# Altium PCB Sensor_Box_Smart_IO.PCBDOC (part 2 of 2)
Units mil, origin at the board's own origin, x right, y up, seen from the top; angles counter-clockwise.
Board outline 895.86 x 2876.17 mil, 2 copper layers (Top, Bot), stack 61.855 mil thick; 100 components, 69 nets, 285 pads, 161 vias.
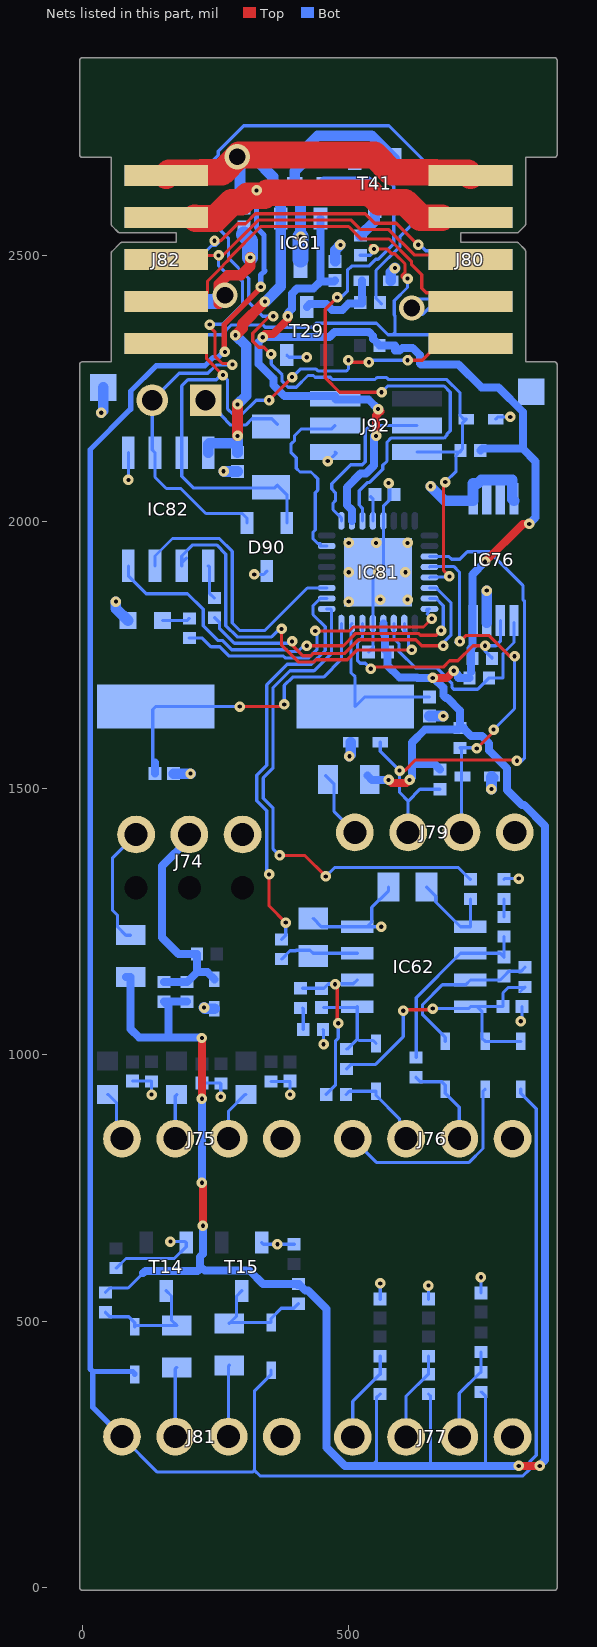
[diagram p2: the nets of this part, all layers, seen from the top]

## Via types
v1: diameter 19.68, hole 7.87, Top to Bot, tented both sides, 151 vias
v2: diameter 19.68, hole 7.87, Top to Bot, 7 vias
v3: diameter 47.24, hole 31.5, Top to Bot, tented both sides, 3 vias

## Nets (pads, with @x,y where several pads share a name; then routed paths per layer and width w, separated by ;. In a path a pad name is that pad's centre, name@x,y a point inside that pad or via, vN(x,y) a via of type N, cw(c..) or ccw(c..) an arc to the next point about the centre after c; other vN are vias at no path point) (continued)
GND: C178.2 C179.2 C180.2 C181.1 C182.1 C183.1 C184.2 C186.2 C189.2 C190.2 C191.2 C221.1 C222.2 C223.2 C306.1 C307.1 D55.2 D89.2 D90.3 D91.2 D124.2 D125.2 D138.2 IC61.3 IC62.4 IC76.1 IC76.2 IC76.3 IC76.4 IC76.7 IC81.5 IC81.21 IC81.33 IC82.5 J74.3 J75.4 J76.4 J77.4 J79.4 J80.9 J81.4 J82.9 J92.6 LD28.1 R233.1 R235.1 R237.1 R240.2 R245.2 R263.1 R266.1 R497.2 T14.2 T15.2 T29.2 T41.2 TP24.1 | length 3020.4
  Top w20: v3@255.91,2409.45 255.91,2445.99 272.76,2462.85 297.49,2462.85 314.96,2480.31 v1(314.96,2496.06)
  Bot w6: R263.1@62.99,599.61 63.78,599.61 81.94,617.77 172.89,617.77 194.88,639.76 T14.2@194.88,647.64 192.91,649.61 v1(165.35,649.61) ; IC82.5@86.42,2129.92 86.61,2129.72 v1(86.61,2078.74) ; C180.2@94.49,950.79 129.13,950.79 R233.1@129.92,950 v1(129.92,925.2) ; C179.2@224.41,946.85 259.05,946.85 R235.1@259.84,946.06 v1(259.84,921.26) ; v1(322.63,1901.29) 340.26,1901.29 D90.3@346.46,1907.48 ; T15.2@336.61,647.64 339.76,644.49 v1(366.14,644.49) R266.1@397.64,644.49 ; R237.1@354.33,950 388.98,950 389.76,949.21 v1(389.76,925.2) ; T29.2@383.86,2312.99 387.79,2309.06 v1(421.26,2309.06) ; C184.2@433.07,1255.91 448.62,1240.35 IC62.4@515.75,1240.35 ; R240.2@451.57,1047.24 452.76,1046.06 v1(452.76,1019.68) ; v1(460.63,2114.17) 461.41,2114.17 476.38,2129.13 J92.6@474.41,2131.1 ; C221.1@537.4,1755.91 545.28,1763.78 IC81.5@545.28,1809.06 545.28,1895.67 v1(555.12,1905.51) 564.96,1915.35 IC81.21@564.96,2001.97 564.96,2029.57 576.77,2041.38 576.77,2070.66 v1(574.7,2072.74) ; C189.2@559.06,541.34 v1(559.06,570.87) ; v1(561.02,1240.16) 515.94,1240.16 IC62.4@515.75,1240.35 ; C186.2@574.8,1314.96 574.8,1308.07 543.26,1276.53 543.26,1249.17 534.45,1240.35 IC62.4@515.75,1240.35 ; v3@616.11,2418.16 657.48,2418.16 669.3,2429.98 711.76,2429.98 J80.9@728.35,2413.39 662.23,2413.39 638.61,2389.76 v3@618.11,2389.76 ; C190.2@649.61,541.34 v1(649.61,566.93) ; C191.2@748.03,553.15 v1(748.03,582.68) ; D91.2@775.59,2192.91 779.53,2196.85 v1(803.15,2196.85) ; R245.2@791.34,1329.53 792.52,1330.71 v1(818.9,1330.71) ; v1(822.83,1062.99) 824.8,1064.96 C183.1@824.8,1090.55
  Bot w20: v1(35.43,2204.72) 39.37,2208.66 TP24.1@39.37,2252.28 ; v1(62.99,1850.39) 62.99,1837.6 LD28.1@85.63,1814.96 ; C306.1@171.47,1527.56 v1(203,1527.56) ; v1(228.35,1088.58) 230.32,1086.61 D55.2@247.92,1086.61 ; v3@255.91,2409.45 240.53,2409.45 ; v3@263.78,2417.32 232.66,2417.32 236.59,2413.39 ; v1(265.1,2095.14) 265.75,2094.49 C223.2@291.34,2094.49 ; v1(409.45,2535.43) 409.45,2600.39 398.71,2611.13 D138.2@398.71,2637.8 398.71,2658.21 R497.2@421.6,2681.1 421.6,2703.99 442.02,2724.41 542.78,2724.41 T41.2@586.09,2681.1 ; C182.1@474.41,2488.82 474.41,2509.84 v1(484.25,2519.68) ; v1(501.18,1560.24) 503.94,1562.99 D124.2@503.94,1586.61 ; D89.2@578.6,2452.76 578.6,2468.36 v1(586.61,2476.37) ; C307.1@651.62,1635.83 677.18,1635.83 v1(677.31,1635.7) ; v1(653.54,2066.92) 653.54,2065.82 679.99,2039.37 733.27,2039.37 IC76.1@733.27,2043.31 733.27,2071.9 741.66,2071.9 748.51,2078.74 807.09,2078.74 807.09,2042.32 IC76.4@810.04,2039.37 ; IC76.7@758.86,1811.02 IC76.7@758.86,1814.96 v1(758.86,1871.06) ; v1(767.72,1498.58) 767.72,1521.32 D125.2@768.6,1522.21 D125.2@770.85,1519.95 ; 236.59,2413.39 J82.9@157.48,2413.39 161.42,2409.45 240.53,2409.45 ; 236.59,2413.39 240.53,2409.45
  Bot w30: 303.15,2539.37 314.96,2527.56 v1(314.96,2496.06) ; IC61.3@409.45,2492.13 v1(409.45,2535.43)
  other v1: 500,1850.39 559.06,1854.33 610.24,1854.33 500,1905.51 606.3,1905.51 500,1960.63 551.18,1960.63 610.24,1960.63
  other v3: 618.11,2401.57 267.72,2425.2
INT: IC81.19 R497.1 T41.1 | length 1229.1
  Top w6: v2@478.35,2426.3 v2(478.35,2421.26) 455.85,2398.76 455.85,2270.12 482.53,2243.44 v2(561.55,2243.44) v2@561.55,2250.52
  Bot w6: v2(478.35,2421.26) 486.22,2421.26 497.53,2432.57 497.53,2472.08 505.37,2479.92 537.66,2479.92 550.71,2492.96 555.05,2492.96 584.33,2522.24 584.33,2630.11 533.34,2681.1 T41.1@511.28,2681.1 ; IC81.19@525.59,2001.97 525.59,2025.85 519.68,2031.76 519.68,2058.57 535.26,2074.14 539.05,2074.14 563.83,2098.92 563.83,2106.23 571.71,2114.1 571.71,2149.79 579.06,2157.14 678.92,2157.14 684.2,2162.41 684.2,2164.51 690.55,2170.87 690.55,2243.44 678.92,2255.06 573.18,2255.06 v2(561.55,2243.44)
  Bot w20: R497.1@458.61,2681.1 T41.1@511.28,2681.1
IO0: J80.10 J82.10 R496.1 | length 873.5
  Top w6: v2@541.41,2518.84 547.24,2513.01 v2(547.24,2511.81) 572.26,2511.81 580.98,2503.09 586.54,2503.09 605.46,2484.18 605.46,2468.57 600.25,2463.36 600.25,2459.35 602.91,2456.69 v2(610.23,2456.69)
  Bot w6: J82.10@157.48,2334.65 174.17,2351.33 261.47,2351.33 279.53,2369.39 339.43,2369.39 343.42,2365.39 431.31,2365.39 438.84,2372.91 552.02,2372.91 573.6,2351.33 582.68,2351.33 ; R496.1@521.73,2500.33 540.17,2500.33 547.24,2507.41 v2(547.24,2511.81) ; v2(610.23,2456.69) 610.23,2439.83 585.49,2415.08 585.49,2388.06 586.54,2387 586.54,2355.2 582.68,2351.33 ; J80.10@728.35,2334.65 711.66,2351.33 582.68,2351.33
MODBUS_A: D90.1 IC82.6 J80.3 J82.3 JP6.2 | length 1465.2
  Top w6: J82.3@157.49,2492.12 165.36,2499.99 v1(255.62,2499.99) ; v1(238.95,2370.17) 238.95,2366.69 248.87,2356.77 248.87,2311.09 262.8,2297.16 279.75,2297.16 v1(281.65,2295.27) ; v1@255.63,2492.13 329.78,2566.28 504.59,2566.28 522.43,2548.43 575.14,2548.43 621.58,2501.99 622.73,2500.84 719.63,2500.84 J80.3@728.35,2492.13
  Bot w6: JP6.2@131.3,2228.35 181.83,2278.87 235.49,2278.87 251.05,2294.43 280.81,2294.43 v1(281.65,2295.27) ; JP6.2@131.89,2228.35 131.3,2227.76 131.3,2135.04 IC82.6@136.42,2129.92 136.42,2084.05 157.87,2062.6 185.04,2062.6 231.94,2015.7 300.24,2015.7 309.06,2006.89 D90.1@309.06,1998.03 ; v1@247.19,2371.83 248.1,2370.92 263.71,2370.92 300.34,2407.55 300.34,2451.63 282.9,2469.07 267.15,2469.07 255.62,2480.6 v1(255.62,2499.99)
MODBUS_B: D90.2 IC82.7 J80.5 J82.5 R327.1 | length 1269.5
  Top w6: J82.5@157.48,2334.65 216.54,2334.65 233.22,2317.96 233.22,2306.15 v1(263.78,2275.59) ; v1(350.39,2228.34) v1(393.7,2271.65) ; v1(499.45,2303.14) 503.12,2299.48 v1(537.88,2299.48) ; v1@614.17,2311.02 610.24,2307.09 v1(610.24,2303.15) 637.8,2303.15 669.29,2334.65 J80.5@728.35,2334.65
  Bot w6: v1(350.39,2228.34) 326.08,2228.34 299.21,2201.47 283.47,2201.47 272.34,2212.6 272.34,2267.03 v1(263.78,2275.59) 260.08,2275.59 251.36,2266.87 198.04,2266.87 186.42,2255.25 IC82.7@186.42,2129.92 186.42,2085.4 207.98,2063.83 361.08,2063.83 366.14,2068.9 383.86,2051.18 D90.2@383.86,1998.03 ; v1(393.7,2271.65) 408.77,2286.72 438.74,2286.72 442.14,2283.32 495.92,2283.32 499.45,2286.85 v1(499.45,2303.14) ; v1(537.88,2299.48) 541.54,2303.15 v1(610.24,2303.15)
MODBUS_DE: IC81.11 IC82.3 | length 537.8
  Bot w6: IC82.3@136.42,1917.32 136.42,1936.02 169.23,1968.83 256.93,1968.83 281.24,1944.53 281.24,1810.22 295.34,1796.11 342.45,1796.11 422.32,1875.98 IC81.11@458.66,1875.98
MODBUS_DI: IC81.31 IC82.4 | length 781.4
  Top w6: v1(421.26,1767.71) 490.04,1767.71 513.01,1790.68 630.88,1790.68 634.47,1787.1 664.29,1787.1 v1(673.23,1796.03)
  Bot w6: IC82.4@86.42,1917.32 86.42,1898.62 119.74,1865.3 197.43,1865.3 226.83,1835.9 226.83,1804.93 254.13,1777.63 262.92,1777.63 280.43,1760.11 382.53,1760.11 385.9,1756.75 404.29,1756.75 415.25,1767.71 v1(421.26,1767.71) ; IC81.31@651.57,1856.3 663.8,1856.3 677.31,1842.79 677.31,1800.11 v1(673.23,1796.03)
MODBUS_R_En: IC81.2 IC82.2 | length 736.1
  Top w6: v1(374.02,1799.21) 374.02,1768.63 405.77,1736.87 434.03,1736.87 438.42,1741.26 497.53,1741.26 516.11,1759.84 v1(618.11,1759.84)
  Bot w6: IC82.2@186.42,1917.32 IC82.2@186.42,1922.88 ; IC82.2@195.23,1931.69 IC82.2@186.42,1922.88 ; v1(374.02,1799.21) 370.31,1799.21 355.21,1784.11 290.37,1784.11 269.24,1805.25 269.24,1939.55 251.96,1956.83 207.23,1956.83 186.42,1936.02 IC82.2@186.42,1922.88 ; IC81.2@604.33,1809.06 604.33,1796.66 612.02,1788.97 612.02,1765.93 v1(618.11,1759.84)
MODBUS_RO: IC81.30 R328.1 | length 627.5
  Top w6: v1(393.7,1775.59) 393.7,1768.62 413.45,1748.87 429.06,1748.87 433.45,1753.26 492.56,1753.26 517.98,1778.68 625.91,1778.68 636.88,1767.71 v1(677.16,1767.71)
  Bot w6: R328.1@248.03,1820.08 248.82,1820.08 257.24,1811.66 257.24,1800.28 285.4,1772.11 390.22,1772.11 v1(393.7,1775.59) ; IC81.30@651.57,1875.98 663.8,1875.98 692.07,1847.71 692.07,1788.22 677.16,1773.32 v1(677.16,1767.71)
NetC183_2: C183.2 D56.1 D57.1 IC62.8 R239.1 R244.1 | length 604.9
  Top w6: v1(602.36,1082.68) 604.33,1084.65 655.51,1084.65 v1(657.48,1086.61)
  Bot w6: R239.1@496.06,973.62 504.48,982.04 550.28,982.04 602.36,1034.12 v1(602.36,1082.68) ; v1(657.48,1086.61) 724.61,1086.61 IC62.8@728.35,1090.35 ; R244.1@822.29,1118.75 R244.1@829.98,1126.43 ; D56.1@822.83,1025.2 D57.1@755.91,1025.2 749.85,1031.25 749.85,1081.54 741.04,1090.35 IC62.8@728.35,1090.35 ; IC62.8@728.35,1090.35 728.54,1090.55 C183.2@789.37,1090.55 789.37,1116.14 799.66,1126.43 R244.1@829.98,1126.43 ; R244.1@829.98,1126.43 830.71,1126.43 R244.1@830.71,1127.17 R244.1@829.98,1126.43
NetC184_1: C184.1 IC62.3 R242.1 | length 151
  Bot w6: R242.1@374.02,1179.53 389.76,1195.28 400.78,1195.28 401.62,1196.12 427.31,1196.12 433.07,1190.35 IC62.3@515.75,1190.35
NetC185_1: C185.1 D58.2 IC62.1 R239.2 | length 191.2
  Bot w6: C185.1@452.76,1088.58 513.98,1088.58 IC62.1@515.75,1090.35 515.75,1030.31 ; R239.2@496.06,1010.63 496.85,1010.63 515.75,1029.53 515.75,1030.31 ; D58.2@551.18,1021.26 545.64,1026.8 519.26,1026.8 515.75,1030.31
NetC185_2: C185.2 IC62.2 R241.1 R243.2 | length 341
  Top w6: v1(474.41,1132.28) 478.35,1128.35 478.35,1061.02 v1(480.31,1059.05)
  Bot w6: R241.1@413.39,1124.8 453.54,1124.8 461.02,1132.28 ; R243.2@457.87,925.2 457.87,925.98 474.86,942.97 474.86,1025.77 480.31,1031.23 v1(480.31,1059.05) ; v1(474.41,1132.28) 461.02,1132.28 ; IC62.2@515.75,1140.35 508.61,1133.22 461.96,1133.22 461.02,1132.28
NetC186_1: C186.1 IC62.5 R247.1 | length 172
  Bot w6: C186.1@645.67,1314.96 663.34,1297.29 663.34,1286.66 709.65,1240.35 IC62.5@728.35,1240.35 R247.1@728.35,1292.52
NetC187_1: C187.1 D59.2 IC62.7 R244.2 | length 307.8
  Bot w6: D59.2@681.1,1025.2 681.1,1032.68 638.64,1075.14 638.64,1094.42 675.76,1131.54 719.54,1131.54 IC62.7@728.35,1140.35 784.06,1140.35 C187.1@791.34,1147.64 800.54,1156.84 823.38,1156.84 R244.2@830.71,1164.17
NetC187_2: C187.2 IC62.6 R246.1 R248.2 | length 353.4
  Bot w6: R248.2@625.98,994.88 626.64,995.54 626.64,1107.35 709.65,1190.35 IC62.6@728.35,1190.35 784.06,1190.35 C187.2@791.34,1183.07 R246.1@791.34,1221.65
NetC222_1: C222.1 IC81.20 | length 46.9
  Bot w6: C222.1@541.34,2047.24 545.28,2043.31 IC81.20@545.28,2001.97
NetC306_2: C306.2 IC81.8 Q11.1 | length 623.9
  Top w6: v1(295.28,1653.54) 375.12,1653.54 v1(379.06,1657.48)
  Bot w6: C306.2@136.04,1527.56 132.19,1531.4 132.19,1647.94 Q11.1@137.8,1653.54 v1(295.28,1653.54) ; v1(379.06,1657.48) 379.06,1693.18 394.63,1708.75 452.84,1708.75 486.22,1742.13 IC81.8@486.22,1809.06
  Bot w15: C306.2@136.04,1527.56 136.04,1548.63
NetC307_2: C307.2 IC81.7 Q11.2 | length 306.5
  Bot w6: IC81.7@505.91,1809.06 504.2,1807.35 504.2,1716.8 511.81,1709.18 Q11.2@511.81,1653.54 529.53,1671.26 C307.2@651.62,1671.26
NetD55_1: D55.1 J74.2 R230.1 R231.1 R232.1 | length 434.5
  Bot w15: R231.1@153.54,1136.61 R230.1@196.85,1136.61 215.3,1155.06 ; J74.2@200.79,1413.39 200.79,1405.51 149.61,1354.33 149.61,1220.08 180.71,1188.98 R232.1@215.3,1188.98 215.3,1155.06 ; D55.1@247.92,1141.73 234.59,1155.06 215.3,1155.06
NetD57_2: D57.2 J76.1 | length 386.6
  Bot w6: J76.1@507.48,842.52 551.91,798.09 725.89,798.09 751.91,824.11 751.91,931.44 D57.2@755.91,935.43
NetD58_1: D58.1 J76.2 R243.1 | length 171.2
  Bot w6: R243.1@494.88,925.2 501.18,931.5 D58.1@551.18,931.5 551.18,924.02 595.07,880.13 595.07,854.93 J76.2@607.48,842.52
NetD59_1: D59.1 J76.3 R248.1 | length 172.6
  Bot w6: R248.1@625.98,957.87 634.4,949.46 674.56,949.46 681.1,942.91 D59.1@681.1,935.43 681.1,927.95 707.48,901.57 J76.3@707.48,842.52
NetD60_2: D60.2 F8.2 R261.2 T14.3 | length 223.6
  Bot w6: R261.2@43.31,516.93 51.72,508.51 87.16,508.51 98.43,497.24 D60.2@98.43,489.76 100.79,492.13 F8.2@177.17,492.13 167.28,502.02 167.28,547.29 T14.3@157.48,557.09
NetD61_2: D61.2 F9.2 R264.2 T15.3 | length 218.1
  Bot w6: F9.2@275.59,496.06 F9.2@277.17,497.64 ; T15.3@299.21,557.09 289.42,547.29 289.42,509.89 F9.2@277.17,497.64 ; R264.2@405.51,532.68 397.09,524.26 373.47,524.26 354.33,505.12 D61.2@354.33,497.64 F9.2@277.17,497.64
NetD89_1: D89.1 R330.2 T29.3 | length 157.9
  Bot w15: T29.3@421.26,2403.54 426.27,2408.55 458.04,2408.55 468.68,2397.92 488.02,2397.92 499.55,2409.45 524.8,2409.45 D89.1@524.8,2452.56
NetD138_1: D138.1 R496.2 T41.3 | length 199.6
  Bot w20: D138.1@453.83,2637.8 536.87,2637.8 548.69,2625.98 T41.3@548.69,2590.55 548.69,2564.3 R496.2@521.73,2537.34
NetF6_1: F6.1 J74.1 | length 226.7
  Bot w6: F6.1@90.55,1224.41 81.69,1224.41 65.99,1240.11 65.99,1262.02 56.35,1271.65 56.35,1368.95 J74.1@100.79,1413.39
NetF7_1: F7.1 J79.1 | length 129
  Bot w6: F7.1@456.69,1523.62 472.39,1507.92 472.39,1456.35 J79.1@511.42,1417.32
NetF8_1: F8.1 J81.2 | length 131.1
  Bot w6: J81.2@174.41,283.46 174.41,410.63 F8.1@177.17,413.39
NetF9_1: F9.1 J81.3 | length 134.3
  Bot w6: J81.3@274.41,283.46 274.41,416.14 F9.1@275.59,417.32
NetIC81_32: IC81.32 R325.1 | length 555
  Top w6: v1(437.01,1795.27) 500.63,1795.27 508.04,1802.68 640.19,1802.68 v1(655.81,1818.3)
  Bot w6: R325.1@200.79,1781.89 224.98,1781.89 241.24,1765.63 257.94,1765.63 275.46,1748.11 377.56,1748.11 380.93,1744.75 424.94,1744.75 440.1,1759.91 440.1,1788.47 437.01,1791.57 v1(437.01,1795.27) ; IC81.32@651.57,1836.61 648.45,1836.61 645.76,1833.93 649.61,1830.09 646.81,1827.3 v1(655.81,1818.3)
NetIC82_1: IC82.1 R328.2 | length 65.5
  Bot w6: IC82.1@236.42,1917.32 238.83,1914.91 238.83,1865.5 247.24,1857.09 R328.2@248.03,1857.09
NetJ75_1: J75.1 R234.2 | length 95.1
  Bot w6: R234.2@47.24,925.2 49.21,925.2 63.93,910.48 63.93,853 J75.1@74.41,842.52
NetJ75_2: J75.2 R236.2 | length 83.8
  Bot w6: J75.2@174.41,842.52 174.41,922.44 R236.2@177.17,925.2
NetJ75_3: J75.3 R238.2 | length 97.4
  Bot w6: J75.3@274.41,842.52 274.41,894.49 305.12,925.2 R238.2@307.09,925.2
NetJ77_1: J77.1 R253.2 R254.2 | length 173.3
  Bot w6: J77.1@507.48,282.78 507.48,349.61 558.27,400.39 R253.2@559.06,400.39 R254.2@559.06,434.25
NetJ77_2: J77.2 R252.2 R255.2 | length 169.4
  Bot w6: J77.2@607.48,282.78 607.48,359.06 648.82,400.39 R252.2@649.61,400.39 R255.2@649.61,434.25
NetJ77_3: J77.3 R251.2 R256.2 | length 176.6
  Bot w6: J77.3@707.48,282.78 707.48,364.57 747.24,404.33 R251.2@748.03,404.33 R256.2@748.03,442.13
NetJ80_4: J80.4 J82.4 | length 720.7
  Top w6: J82.4@157.48,2413.39 174.07,2429.98 235.09,2429.98 235.09,2452.05 264.89,2481.85 264.89,2482.62 274.46,2492.19 274.46,2493.99 334.75,2554.28 499.62,2554.28 523.25,2530.65 536.25,2530.65 536.44,2530.84 575.77,2530.84 617.46,2489.15 617.46,2483.58 636.95,2464.08 636.95,2438.09 645.06,2429.98 711.76,2429.98 J80.4@728.35,2413.39
NetJ80_6: J80.6 J82.6 | length 652.9
  Bot w6: J82.6@157.48,2649.61 216.54,2649.61 255.21,2688.28 255.21,2695.67 302.95,2743.41 575.49,2743.41 669.29,2649.61 J80.6@728.35,2649.61
NetJ80_7: J80.7 R330.1 | length 296.2
  Bot w6: R330.1@561.29,2409.45 R330.1@558.67,2412.07 551.04,2419.7 551.04,2471.98 596.33,2517.27 596.33,2536.36 630.83,2570.87 J80.7@728.35,2570.87
NetJ80_8: J80.8 J82.8 | length 657.4
  Top w6: v1(248.03,2527.55) 259.55,2527.55 291.61,2559.61 306.14,2559.61 324.81,2578.28 530.98,2578.28 548.82,2560.43 589.17,2560.43 629.61,2519.99 v1(630.23,2519.99)
  Bot w6: J82.8@157.48,2492.13 216.63,2492.13 243.34,2518.84 250.88,2518.84 255.62,2523.57 251.64,2527.55 v1(248.03,2527.55) ; v1(630.23,2519.99) 633.32,2519.99 644.59,2508.72 652.61,2508.72 669.2,2492.13 J80.8@728.35,2492.13
NetJP6_1: JP6.1 R327.2 | length 164.7
  Bot w6: JP6.1@231.3,2228.35 257.83,2201.82 260.34,2201.82 260.34,2199.76 278.5,2181.6 306.36,2181.6 318.36,2193.6 355.61,2193.6 R327.2@366.14,2183.07
NetLD28_2: LD28.2 R325.2 | length 51.8
  Bot w6: LD28.2@150.59,1814.96 196.85,1814.96 R325.2@200.79,1818.9
NetR240_1: R240.1 R241.2 | length 41
  Bot w6: R241.2@413.39,1087.8 414.57,1086.61 R240.1@414.57,1047.24
NetR245_1: R245.1 R246.2 | length 33.9
  Bot w6: R246.2@791.34,1258.66 R245.1@791.34,1292.52
P3V3: C182.2 C221.2 F6.2 F7.2 IC61.2 IC76.8 IC81.4 IC81.18 J92.2 R230.2 R231.2 R251.1 R252.1 R253.1 R259.1 R260.1 R261.1 R264.1 R322.1 R323.1 R324.1 R329.2 TP23.1 | length 6628.4
  Top w15: v1(224.41,759.84) 224.41,758.57 226.38,756.61 v1(226.38,679.13) ; v1(224.41,917.32) v1(224.41,1031.5) ; v1(338.58,2346.46) 338.58,2347.72 343.1,2352.24 357.69,2352.24 385.83,2380.37 v1(385.83,2385.82) ; v1(551.18,2161.41) 551.18,2199.52 v1@559.18,2207.52 ; v1(574.8,1515.74) 580.64,1509.91 608.33,1509.91 v1(614.17,1515.75) ; v1(657.48,1707.32) 683.7,1707.32 v1(696.85,1720.47) ; v1(755.91,1925.2) 826.77,1996.06 v1(838.58,1996.06) ; v1(818.9,228.35) v1(858.27,228.35)
  Bot w6: R261.1@43.31,553.94 51.72,562.35 85.98,562.35 114.17,590.55 ; 543.31,228.35 551.91,236.95 551.91,356.24 R253.1@559.06,363.39 ; R252.1@649.61,363.39 653.54,359.45 653.54,228.35 ; R251.1@748.03,367.32 748.38,367.32 756.8,358.91 756.8,233.18 751.97,228.35
  Bot w15: F6.2@81.69,1145.67 F6.2@90.55,1145.67 90.55,1048.62 106.78,1032.39 161.42,1032.39 ; 114.17,590.55 118.11,594.49 216.54,594.49 220.47,598.43 ; R230.2@196.85,1099.61 R231.2@153.54,1099.61 161.42,1091.73 161.42,1032.39 ; v1(224.41,759.84) v1(224.41,917.32) ; v1(224.41,1031.5) 223.51,1032.39 161.42,1032.39 ; v1(226.38,679.13) 226.38,626.58 220.47,620.67 220.47,598.43 ; v1(385.83,2385.82) 385.83,2392.18 393.42,2399.78 393.42,2428.26 402.87,2437.71 433.43,2437.71 446.85,2451.13 ; R264.1@403.54,567.72 401.57,569.68 339.17,569.68 314.04,594.82 229.99,594.82 226.38,598.43 220.47,598.43 ; R264.1@405.51,569.68 406.3,569.68 418.39,557.59 423.31,557.59 458.01,522.89 458.01,263.05 492.71,228.35 543.31,228.35 653.54,228.35 751.97,228.35 v1(818.9,228.35) ; IC61.2@446.85,2568.9 446.85,2451.13 ; C182.2@474.41,2453.39 472.15,2451.13 446.85,2451.13 ; IC81.18@505.91,2001.97 505.91,2022.21 496.34,2031.77 496.34,2064.78 522.2,2090.64 532.22,2090.64 547.33,2105.76 547.33,2161.5 547.42,2161.41 v1(551.18,2161.41) ; F7.2@535.43,1523.62 543.31,1515.74 v1(574.8,1515.74) ; v1(555.12,2211.58) 537.46,2229.24 476.27,2229.24 J92.2@474.41,2231.1 474.41,2236.31 379.06,2236.31 358.36,2257.01 358.36,2268.97 330.99,2296.34 330.99,2337.59 338.58,2345.19 v1(338.58,2346.46) 339.29,2347.16 464.11,2347.16 473.36,2356.41 537.88,2356.41 545.78,2348.51 545.78,2343.59 557.87,2331.5 R329.2@557.87,2330.71 586.61,2330.71 586.61,2321.31 595.39,2321.31 600.57,2326.49 619.9,2326.49 633.58,2312.82 633.58,2297.62 635.64,2295.56 706.18,2295.56 749.47,2252.28 780.73,2252.28 826.49,2206.52 826.49,2137.52 ; IC81.4@564.96,1809.06 565.24,1808.78 565.24,1790.19 568.13,1787.3 568.13,1760.61 C221.2@572.83,1755.91 572.83,1730.31 594.77,1708.38 627.64,1708.38 628.7,1707.32 v1(657.48,1707.32) 659.06,1707.32 677.33,1689.06 677.33,1674.27 682.21,1669.38 685.02,1669.38 708.66,1645.74 R260.1@708.66,1612.99 ; v1(614.17,1515.75) 618.67,1520.25 618.67,1545.64 ; R259.1@671.31,1535.15 660.81,1545.64 618.67,1545.64 ; v1(696.85,1720.47) 704.72,1712.59 704.72,1708.33 705.73,1707.32 R322.1@726.28,1707.32 ; R260.1@716.54,1612.99 R260.1@714.37,1612.99 ; R322.1@729.19,1718.38 729.19,1761.42 728.35,1762.26 732,1765.92 732,1901.29 v1(755.91,1925.2) ; R324.1@746.85,2133.86 750.51,2137.52 826.49,2137.52 ; v1(838.58,1996.06) 850.58,2008.06 850.58,2113.43 826.49,2137.52 ; v1(858.27,228.35) 858.27,229.61 868.41,239.76 868.41,1429.53 829.16,1468.78 824.98,1468.78 796.86,1496.89 796.86,1537.64 763.5,1571 763.5,1584.47 749.83,1598.15 729.21,1598.15 R260.1@714.37,1612.99 ; 618.67,1545.64 618.67,1586.1 642.7,1610.12 705.79,1610.12 R260.1@708.66,1612.99 ; R260.1@708.66,1612.99 R260.1@714.37,1612.99
P5V0: C181.2 C223.1 IC61.1 IC82.8 J80.1 J82.1 | length 1404.5
  Top w20: v1(287.4,2350.39) 300.53,2363.51 300.53,2371.39 v1@339.52,2410.38 ; v1(291.34,2161.41) v1(291.34,2220.47)
  Top w50: J82.1@157.48,2649.61 162.8,2654.92 222.47,2654.92 223.56,2656.01 261.69,2656.01 v3(290.72,2685.04) 294.1,2688.42 548.11,2688.42 580.53,2656.01 662.27,2656.01 663.36,2654.92 723.03,2654.92 J80.1@728.35,2649.61
  Bot w20: IC82.8@236.42,2129.92 236.42,2145.83 238.23,2147.64 291.34,2147.64 ; v1(287.4,2350.39) 307.49,2330.3 307.49,2295.55 307.49,2236.62 v1(291.34,2220.47) ; v3(290.72,2685.04) v3@295.93,2679.83 ; C223.1@291.34,2129.92 291.34,2147.64 ; v1(291.34,2161.41) 291.34,2147.64 ; 295.93,2602.36 v3@295.93,2679.83 ; v1(342.52,2413.38) 343.63,2413.38 372.05,2441.8 IC61.1@372.05,2568.9 372.05,2594.49 370.24,2596.3 370.24,2605.57 357.69,2618.11 357.69,2647.35 325.22,2679.83 v3@295.93,2679.83
P12V0: D56.2 D60.1 D61.1 J80.2 J81.1 J82.2 | length 4887.1
  Top w10: v1(267.72,2318.9) 266.4,2320.21 266.4,2370.56 334.65,2438.8 v1(334.65,2440.94)
  Top w50: J82.2@211.22,2570.87 212.69,2569.39 249.88,2569.39 280.49,2600.01 298.46,2600.01 310.72,2612.28 341.61,2612.28 346.95,2617.62 539.72,2617.62 557.33,2600.01 605.34,2600.01 634.48,2570.87 J80.2@674.61,2570.87
  Bot w6: J81.1@74.41,283.46 140.92,216.96 319.32,216.96 322.83,220.47 ; D61.1@354.33,407.87 354.33,400.39 322.83,368.9 322.83,220.47 ; D56.2@822.83,935.43 822.83,927.95 851.91,898.87 851.91,248.64 839.31,236.03 839.31,222.11 826.7,209.5 333.8,209.5 322.83,220.47
  Bot w10: J81.1@74.41,283.46 19.69,338.19 19.69,405.51 ; D60.1@98.43,400 98.43,401.46 94.37,405.51 19.69,405.51 ; v1(267.72,2318.9) 265.1,2318.9 254.63,2308.43 245.25,2308.43 229.69,2292.87 138.51,2292.87 90.77,2245.13 90.77,2211.58 14.59,2135.4 14.59,410.61 19.69,405.51 ; v1(326.9,2622.05) 326.9,2552.39 340.96,2538.33 340.96,2472.66 342.52,2471.1 334.65,2463.23 v1(334.65,2440.94)
PROG_MOSI: IC81.15 J92.4 | length 351.4
  Bot w6: IC81.15@458.66,1954.72 446.44,1954.72 446.44,1959.5 441.66,1959.5 432.93,1968.24 432.93,1980.58 437.19,1984.84 437.19,2055.05 441.79,2059.65 441.79,2080.92 429.06,2093.64 408.42,2093.64 401.39,2100.67 401.39,2120.39 391.47,2130.31 391.47,2145.92 393.04,2147.5 398.31,2152.77 398.31,2162.09 410.29,2174.07 467.38,2174.07 J92.4@474.41,2181.1
PROG_SCK: IC81.17 J92.3 | length 320.8
  Bot w6: IC81.17@486.22,2001.97 486.22,2007.4 486.05,2007.4 470.44,2023.01 470.44,2035.01 474.87,2039.44 474.87,2055.05 468.03,2061.89 468.03,2071.62 503.56,2107.14 525.38,2107.14 530.83,2112.59 530.83,2171.65 539.92,2180.74 595.3,2180.74 595.67,2181.1 J92.3@627.95,2181.1
PWM1: IC81.10 R242.2 | length 772.6
  Top w6: v1(350.39,1338.58) 350.39,1279.53 v1(381.89,1248.03)
  Bot w6: v1(350.39,1338.58) 346.08,1342.9 346.08,1457.87 327.42,1476.52 327.42,1524.58 346.08,1543.24 346.08,1694.14 384.69,1732.75 429.91,1732.75 455.85,1758.69 455.85,1803.08 432.93,1826 432.93,1842.79 446.44,1856.3 IC81.10@458.66,1856.3 ; R242.2@374.02,1216.54 381.89,1224.41 v1(381.89,1248.03)
PWM2: IC81.9 R247.2 | length 953.3
  Top w6: v1(370.08,1374.01) 417.32,1374.01 v1(456.69,1334.64)
  Bot w6: v1(370.08,1374.01) 358.08,1386.01 358.08,1462.84 339.42,1481.49 339.42,1519.61 358.08,1538.27 358.08,1689.17 389.66,1720.75 434.88,1720.75 467.85,1753.72 467.85,1833.93 465.17,1836.61 IC81.9@458.66,1836.61 ; v1(456.69,1334.64) 473.57,1351.52 705.57,1351.52 727.56,1329.53 R247.2@728.35,1329.53
RESETn: D91.1 IC81.29 J82.7 J92.5 R324.2 | length 1357.4
  Top w6: v1(354.33,2314.96) 353,2314.96 340.34,2327.61 330.78,2327.61 319.74,2338.65 319.74,2354.26 351.3,2385.82 v1(358.27,2385.82) ; v1(681.1,2074.8) 678.01,2071.71 678.01,1908.61 v1(688.98,1897.64)
  Bot w6: J82.7@157.48,2570.87 216.63,2570.87 233.22,2554.28 236.29,2554.28 240.23,2558.21 247.68,2558.21 274.46,2531.43 274.46,2494.47 310.28,2458.66 312.34,2456.6 312.34,2412.07 338.58,2385.82 v1(358.27,2385.82) ; v1(354.33,2314.96) 354.54,2314.74 354.54,2296.11 374.86,2275.8 374.86,2263.85 385.9,2252.81 401.51,2252.81 423.42,2274.72 433.77,2274.72 437.17,2271.32 465.28,2271.32 469.35,2267.25 549.26,2267.25 552.82,2270.81 571.09,2270.81 574.83,2267.06 683.9,2267.06 708.71,2242.25 708.71,2199.76 715.55,2192.91 D91.1@720.47,2192.91 713.63,2186.07 713.63,2137.65 R324.2@709.84,2133.86 707.09,2131.1 J92.5@627.95,2131.1 ; IC81.29@651.57,1895.67 652.56,1896.65 687.99,1896.65 v1(688.98,1897.64) ; v1(681.1,2074.8) 701.43,2095.13 701.43,2124.65 707.87,2131.1 R324.2@709.5,2131.1
SCL: D125.1 IC81.28 J79.3 R260.2 | length 721.5
  Top w6: v1(708.66,1775.59) 719.63,1786.56 763.71,1786.56 802.24,1748.03 v1(811.02,1748.03) ; v1(740.16,1574.8) 771.65,1606.3 v1(771.65,1610.24)
  Bot w6: IC81.28@651.57,1915.35 652.7,1916.48 696.78,1916.48 707.82,1905.44 707.82,1780.93 v1@702.47,1775.59 ; v1@700.79,1773.9 v1@702.47,1775.59 ; v1(708.66,1775.59) v1@702.47,1775.59 ; J79.3@711.42,1417.32 711.42,1573.23 R260.2@708.66,1575.98 741.34,1575.98 v1(740.16,1574.8) ; v1(771.65,1610.24) 811.02,1649.6 v1(811.02,1748.03)
SCL1: IC76.6 IC81.6 R323.2 | length 439.4
  Top w6: v1(541.34,1724.41) 544.43,1727.5 677.24,1727.5 689.04,1739.31 704.79,1739.31 733.19,1767.71 v1(755.9,1767.71)
  Bot w6: IC81.6@525.59,1809.06 525.59,1782.88 516.2,1773.49 516.2,1739.97 521.47,1734.7 531.05,1734.7 v1(541.34,1724.41) ; R323.2@769.01,1746.25 R323.2@769.01,1744.09 755.9,1757.2 v1(755.9,1767.71) 776.45,1767.71 784.45,1775.71 IC76.6@784.45,1814.96
SDA: D124.1 IC81.27 J79.2 R259.2 | length 1043.8
  Top w6: v1(595.33,1533.25) 605.03,1533.25 625.2,1553.43 814.09,1553.43 v1(815.65,1551.87) v1@818.21,1551.87
  Bot w6: D124.1@559.06,1586.61 559.06,1569.53 v1(595.33,1533.25) 595.33,1492.11 611.42,1476.02 ; J79.2@611.42,1417.32 611.42,1476.02 ; IC81.27@651.57,1935.04 687.91,1935.04 692.98,1929.97 708.59,1929.97 722.66,1944.04 763.71,1944.04 826.86,1880.89 826.86,1854.13 829.86,1851.13 829.86,1557.3 823.68,1551.11 823.68,1550.68 822.49,1551.87 v1(815.65,1551.87) ; R259.2@671.31,1498.14 633.54,1498.14 611.42,1476.02
SDA1: IC76.5 IC81.3 R322.2 | length 406.8
  Bot w6: IC81.3@584.65,1809.06 584.65,1781.23 594.04,1771.84 594.04,1757.26 625.14,1726.16 665.29,1726.16 678.01,1713.44 678.01,1711.71 693.83,1695.89 693.83,1688.97 696.91,1685.88 741.85,1685.88 R322.2@763.29,1707.32 789.43,1707.32 789.43,1753.08 810.04,1773.69 IC76.5@810.04,1811.02
pads on no net: J74.4 J74.5 J74.6

## Polygon pours and split planes (outlines as drawn)
GND on Top "Signal Layer 1-No Net 1" (solid, remove dead copper, pour order 0): -7.87,2866.14 889.76,2866.14 889.76,0 881.89,-7.87 877.95,-3.94 0,-3.94

## Keep-outs
Top:
  lines w3.94: 0,35.43 885.83,35.43 ; 0,2830.71 881.89,2830.71
Bot:
  lines w3.94: 0,104.33 885.83,104.33 ; 0,2761.81 881.89,2761.81
KeepOutLayer:
  circle w10: c100.79,1313.39 r21.65
  circle w10: c200.79,1313.39 r21.65
  circle w10: c300.79,1313.39 r21.65
  lines w3.94: 59.06,2295.28 0,2295.28 0,3.94 3.94,0 7.87,3.94 885.83,3.94 885.83,2295.28 728.35,2295.28 ; 236.22,2606.3 236.22,2618.11 ; 240.16,2688.98 236.22,2692.91 0,2692.91 0,2866.14 881.89,2866.14 881.89,2688.98 826.77,2688.98 649.61,2688.98 ; 649.61,2370.08 649.61,2377.95 ; 649.61,2444.88 649.61,2460.63 ; 649.61,2527.56 649.61,2535.43 ; 649.61,2610.24 649.61,2614.17

## Other copper
Bot:
  rectangle net GND: 606.3,2389.76 657.48,2421.26

## Silkscreen, mask and mechanical layers (free items; w line width, h text height)
TopOverlay:
  text "SMART IO / Analog & Digital" at 0,1803.15 h59.06
  text "v1.0" at 338.58,1728.35 h60
  text "1-Wire" at 47.24,1594.49 h59.06
  text "I2C" at 570.87,1590.55 h59.06
  text "V" at 82.68,1212.6 h47.24
  text "V" at 500,1208.66 h47.24
  text "G" at 791.34,1208.66 h47.24
  text "D" at 185.04,1204.72 h47.24
  text "G" at 287.4,1204.72 h47.24
  text "D" at 594.49,1204.72 h47.24
  text "C" at 696.85,1204.72 h47.24
  text "Analog  / IN" at 23.62,980.31 h59.06
  text "Analog  / OUT" at 468.5,976.38 h59.06
  text "V" at 476.38,665.35 h47.24
  text "A1" at 43.31,661.42 h47.24
  text "O1" at 594.49,661.42 h47.24
  text "O2" at 692.91,661.42 h47.24
  text "A2" at 145.67,657.48 h47.24
  text "A3" at 251.97,657.48 h47.24
  text "G" at 368.11,657.48 h47.24
  text "G" at 807.09,657.48 h47.24
  text "TTL" at 732.28,456.69 h47.24
  text "Digital / OUT" at 51.18,425.2 h59.06
  text "Digital / IN" at 464.56,421.56 h59.06
  text "O1" at 157.48,66.93 h47.24
  text "O2" at 255.91,66.93 h47.24
  text "I1" at 476.38,66.93 h47.24
  text "I2" at 582.68,66.93 h47.24
  text "I3" at 681.1,66.93 h47.24
  text "G" at 818.9,66.93 h47.24
  text "G" at 370.08,62.99 h47.24
  text "12V" at 15.08,62.33 h47.24
Mechanical1:
  lines w10: 874.02,2295.28 826.77,2295.28 ; 874.02,2688.98 826.77,2688.98 ; 0,2295.28 59.06,2295.28 ; 0,2295.28 59.06,2295.28 ; 0,2295.28 0,0 885.83,0 885.83,59.06 885.83,2295.28 826.77,2295.28 ; 59.06,2295.28 59.06,2503.94 74.8,2519.68 181.1,2519.68 181.1,2531.5 181.1,2543.31 74.8,2543.31 59.06,2559.06 59.06,2688.98 0,2688.98 0,2866.14 885.83,2866.14 885.83,2688.98 ; 826.77,2295.28 826.77,2507.87 822.84,2511.81 814.96,2519.69 704.73,2519.69 704.73,2543.31 811.02,2543.31 826.77,2559.06 826.77,2688.98 ; 826.77,2688.98 885.83,2688.98 ; 826.77,2688.98 885.83,2688.98 ; 826.77,2688.98 885.83,2688.98

## Text inside footprints (layer, text, board x,y; h text height)
J74: TopOverlay "3" at 285.79,1483.39 h39.37; TopOverlay "2" at 185.79,1483.39 h39.37; TopOverlay "1" at 95.79,1483.39 h39.37
J75: TopOverlay "4" at 359.41,912.52 h39.37; TopOverlay "1" at 69.41,912.52 h39.37; TopOverlay "2" at 159.41,912.52 h39.37; TopOverlay "3" at 259.41,912.52 h39.37
J76: TopOverlay "4" at 792.48,912.52 h39.37; TopOverlay "1" at 502.48,912.52 h39.37; TopOverlay "2" at 592.48,912.52 h39.37; TopOverlay "3" at 692.48,912.52 h39.37
J77: TopOverlay "4" at 792.48,352.78 h39.37; TopOverlay "1" at 502.48,352.78 h39.37; TopOverlay "2" at 592.48,352.78 h39.37; TopOverlay "3" at 692.48,352.78 h39.37
J79: TopOverlay "4" at 796.42,1487.32 h39.37; TopOverlay "1" at 506.42,1487.32 h39.37; TopOverlay "2" at 596.42,1487.32 h39.37; TopOverlay "3" at 696.42,1487.32 h39.37
J80: TopOverlay "1" at 601.38,2625.2 h47.24; TopOverlay "5" at 589.57,2311.02 h47.24; BottomOverlay "6" at 596.46,2672.44 h47.24 r180; BottomOverlay "10" at 555.12,2358.27 h47.24 r180
J81: TopOverlay "4" at 359.41,353.46 h39.37; TopOverlay "1" at 69.41,353.46 h39.37; TopOverlay "2" at 159.41,353.46 h39.37; TopOverlay "3" at 259.41,353.46 h39.37
J82: TopOverlay "5" at 268.7,2303.94 h47.24; TopOverlay "1" at 280.51,2618.11 h47.24; BottomOverlay "10" at 273.62,2351.18 h47.24 r180; BottomOverlay "6" at 285.43,2665.35 h47.24 r180